# Altium PCB Motor-28.PcbDoc
Units mm, origin at the board's own origin, x right, y up, seen from the top; angles counter-clockwise.
Board outline 28 x 28 mm, 2 copper layers (Top Layer, Bottom Layer); 33 components, 20 nets, 185 pads, 45 vias.
Unrouted connection lines stored in the file: 17.
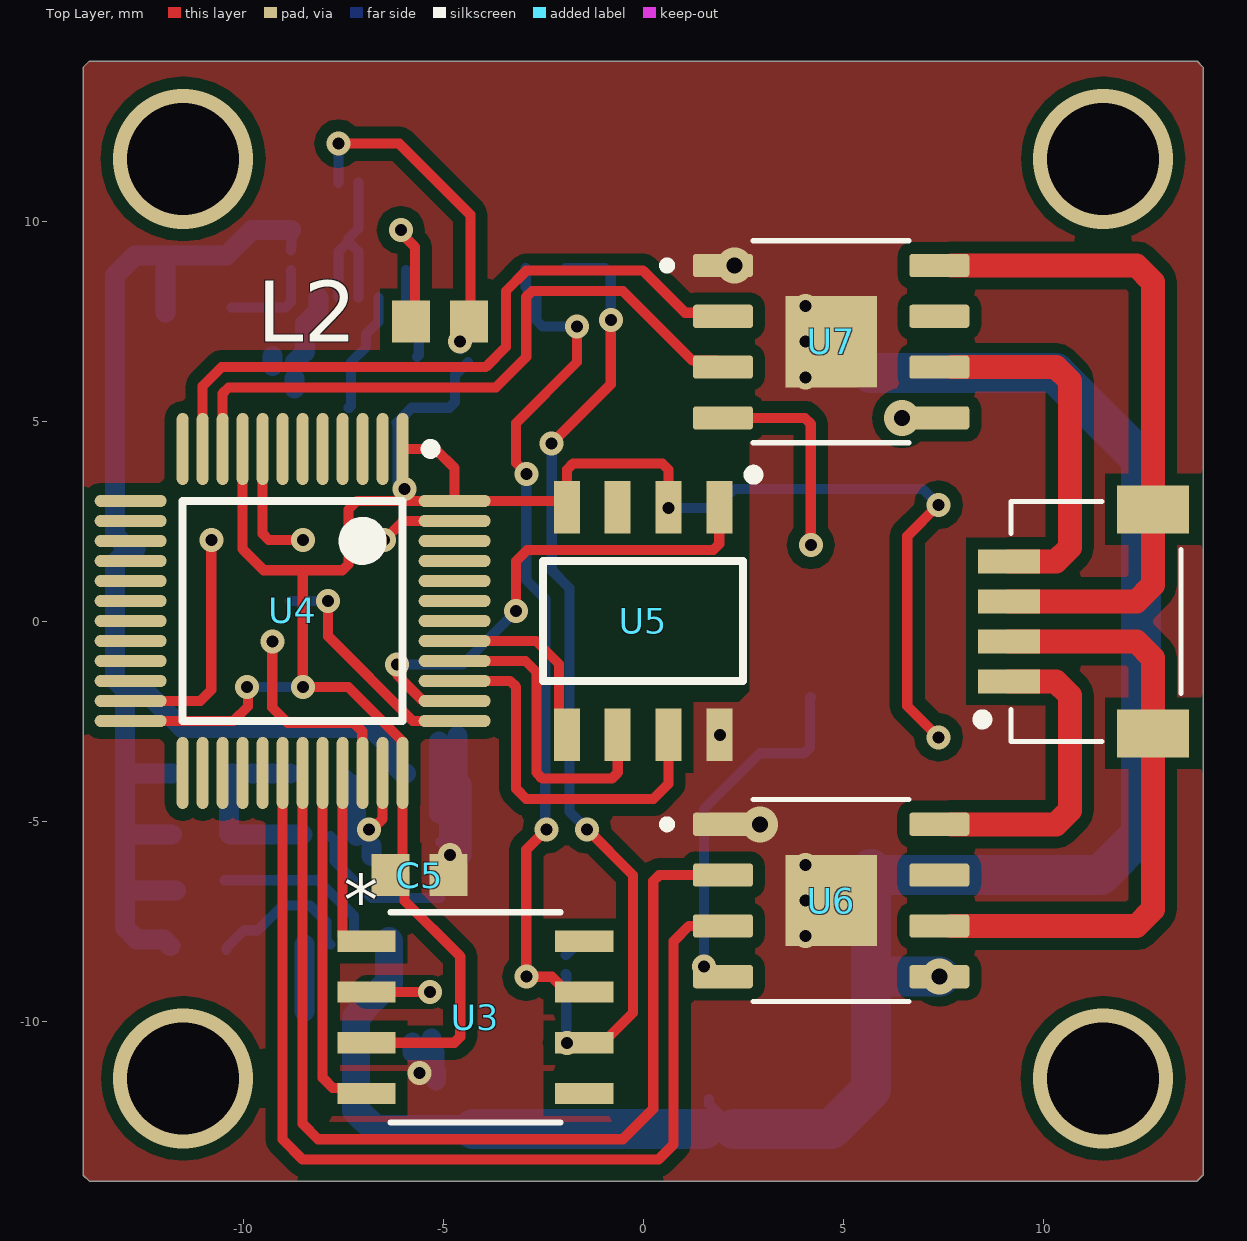
[diagram p0: Top Layer view]
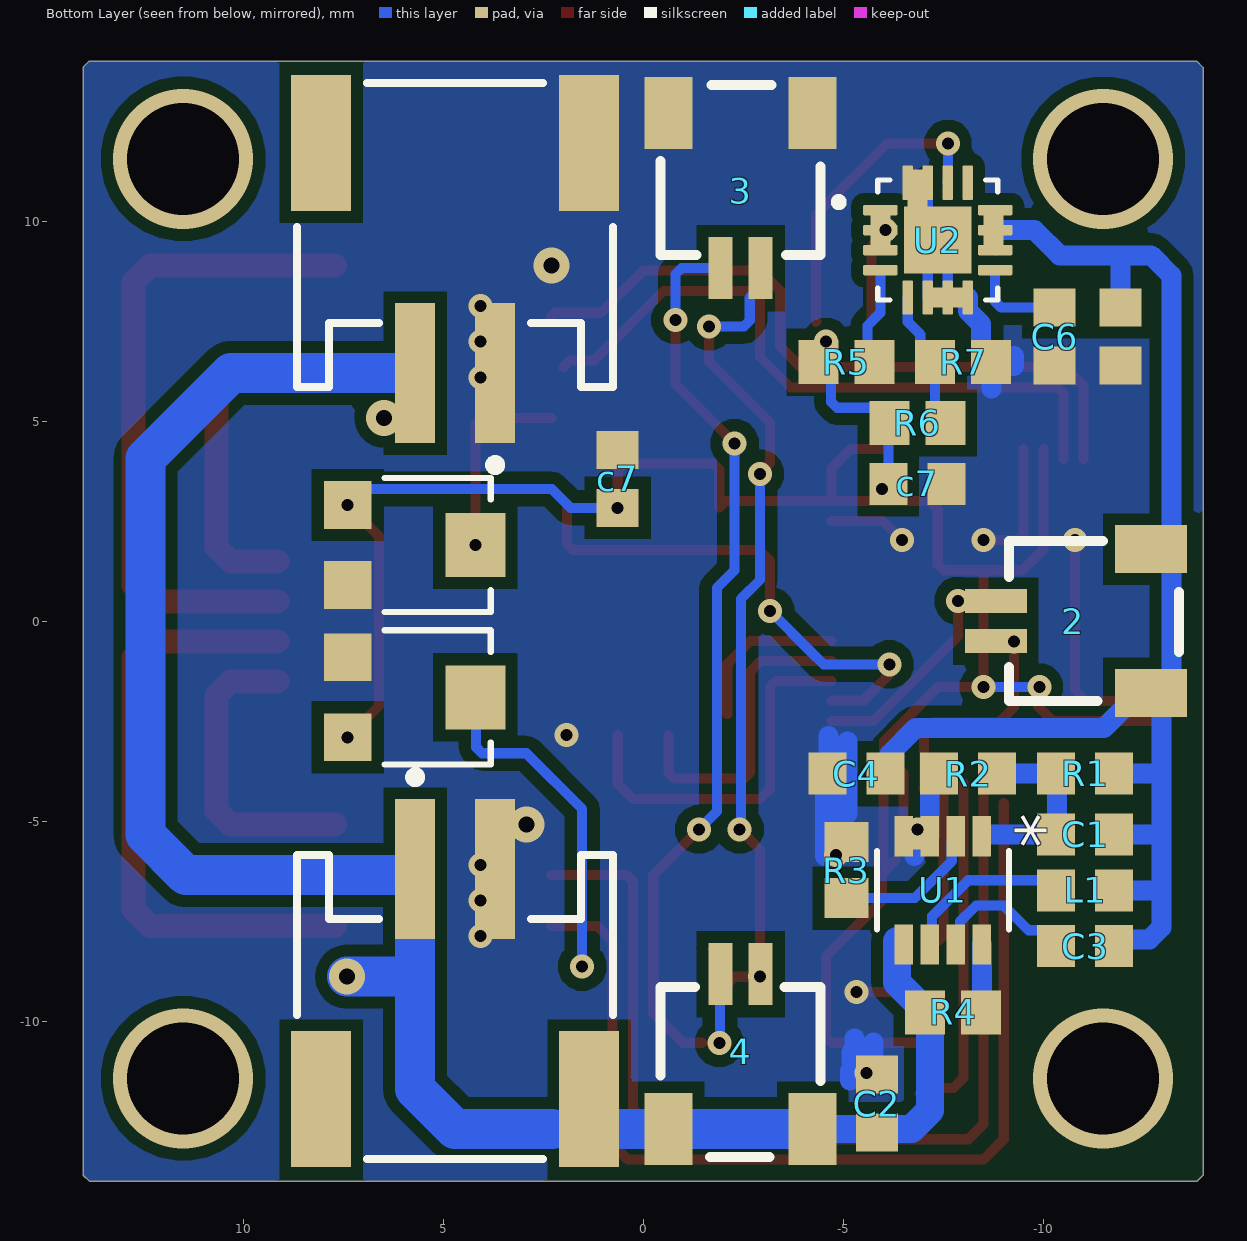
[diagram p1: Bottom Layer view, seen from below]
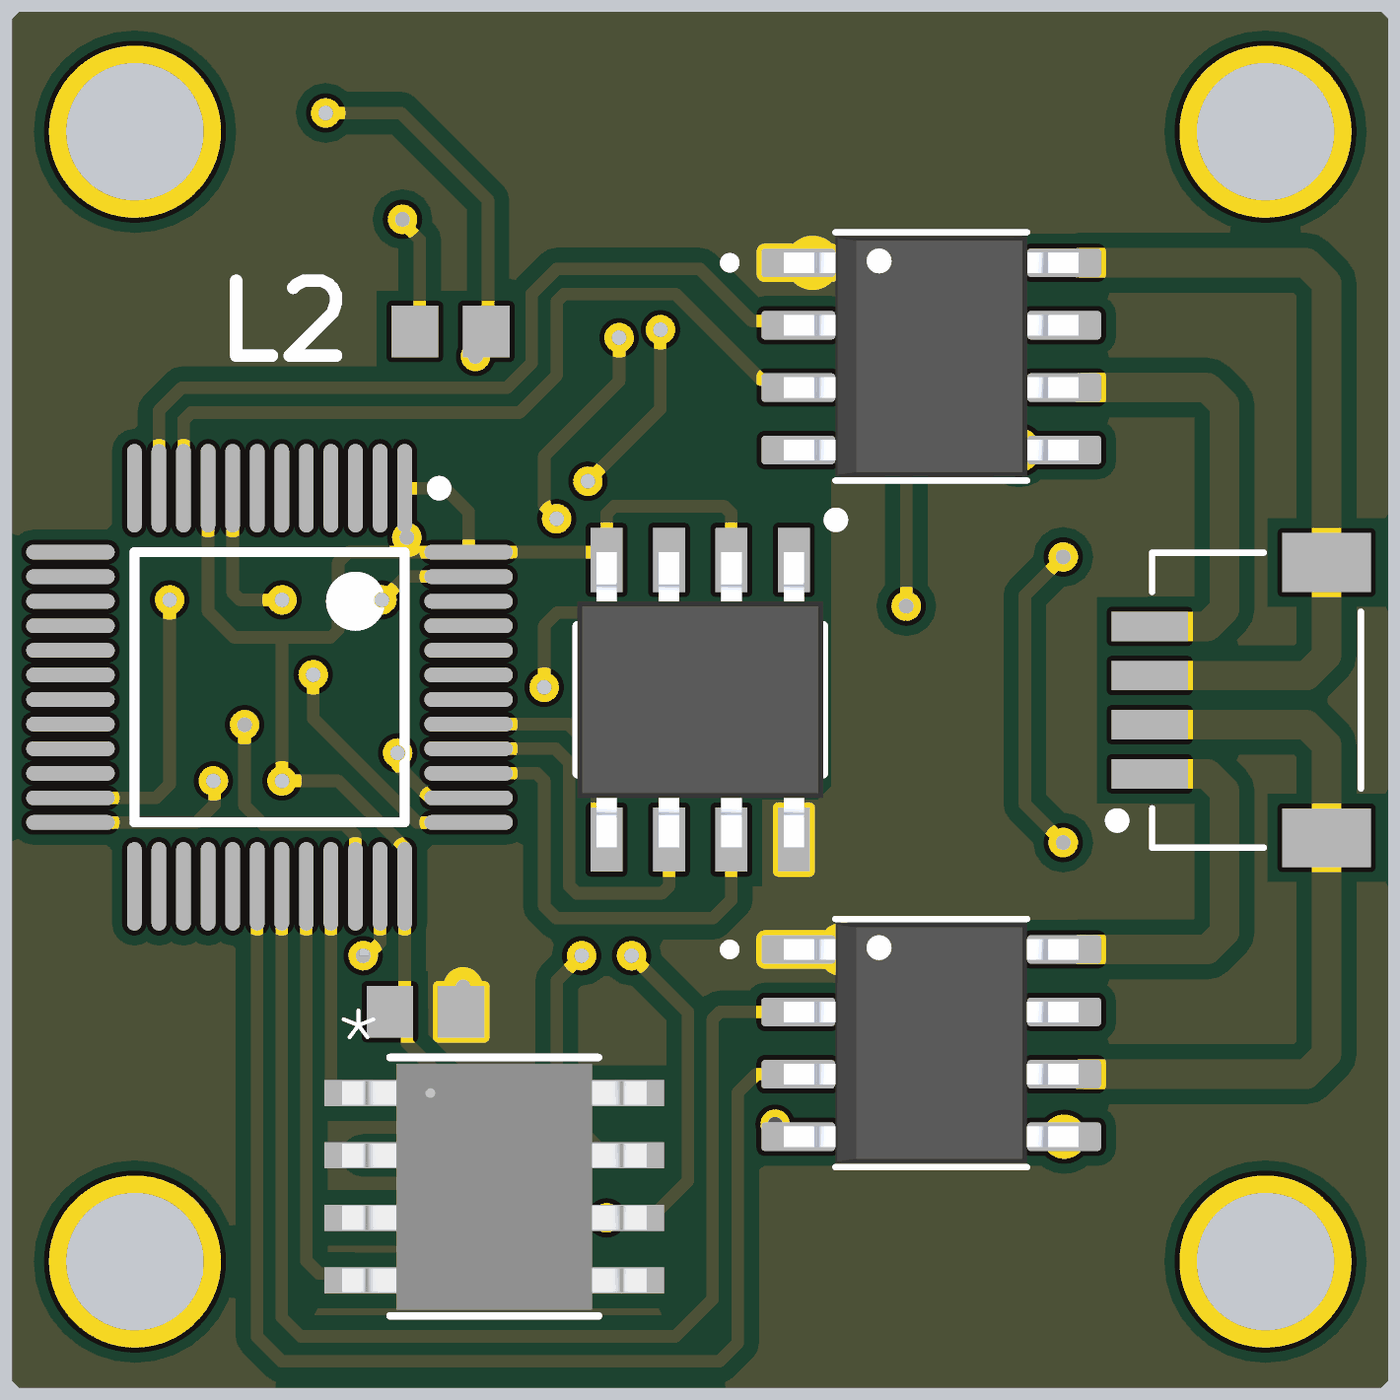
[diagram p2: 3D render of the assembled board from above, using the file's embedded part models]

## Layer stack, top to bottom
Top Solder: solder mask 0.0102, Solder Resist, Dk 3.5
Top Layer: signal copper 0.0356
Dielectric 1: dielectric 0.32, FR-4, Dk 4.8
Bottom Layer: signal copper 0.0356
Bottom Solder: solder mask 0.0102, Solder Resist, Dk 3.5

## Board outline
-13.851,-14 -14,-13.851 -14,13.843 -13.843,14 13.851,14 14,13.851 14,-13.851 13.851,-14

## Design rules (kind name [scope] priority, off if disabled: settings)
Clearance [All] p1: gap=0.1 ignorepadtopadclearanceinfootprint=TRUE
PolygonConnect [All] p1: connectstyle=Direct reliefconductorwidth=0.254 reliefentries=4 polygonreliefangle="90 Angle" airgapwidth=0.254
RoutingVias [All] p1: holewidth=0.711 width=1.27 viastyle="Through Hole" minholewidth=0 minwidth=0 maxholewidth=5 maxwidth=5
SolderMaskExpansion [All] p1: expansion=0.102 istentingtop=FALSE
Width [All] p1: maxlimit=3 minlimit=0.254 preferedwidth=0.254
30 further rules are at their usual default settings.

## Classes and differential pairs
component class Motor-28: C1 C2 C3 C4 C6 c7 R1 R2 R3 R4 R5 R6 R7 U1 U2 U3 U4 U5 U6 U7

## Components (designator, comment, footprint, x,y, rotation, side; value= is the part's Value field where it differs from the comment)
2 "Comment" SM02B-SRSS-TB(LF)(SN) -10.795,0 r90 bottom
3 "Comment" SM02B-SRSS-TB(LF)(SN) -2.435,10.8 r0 bottom
4 "Comment" SM02B-SRSS-TB(LF)(SN) -2.435,-10.8 r180 bottom
C1 "12pF" CAPC1608X90X35ML10T15 -11.049,-5.334 r180 bottom
C2 "100uF" CAPC1608X90X35ML10T15 -5.842,-12.065 r270 bottom
C3 "10nF" CAPC1608X90X35ML10T15 -11.049,-8.128 r180 bottom
C4 "100uF" CAPC1608X90X35ML10T15 -5.334,-3.81 r180 bottom
C5 "100uF" CAPC1608X90X35ML10T15 -5.588,-6.35 r180 top (schematic designator C4)
C5 "10uF" CAPC1608X90X35ML10T15 -11.938,7.112 r90 bottom
C6 "3.3nF" CAPC1608X90X35ML10T15 -10.287,7.112 r90 bottom
c7 "22uF" CAPC1608X90X35ML10T15 0.635,3.556 r90 bottom
c7 "22uF" CAPC1608X90X35ML10T15 -6.858,3.429 r0 bottom
L1 "10nF" CAPC1608X90X35ML10T15 -11.049,-6.731 r180 bottom (schematic designator C3)
L2 "10nF" CAPC1608X90X35ML10T15 -5.08,7.493 r0 top (schematic designator C3)
R1 "110K" RESC1608X55X30ML20T20#1 -11.049,-3.81 r180 bottom
R2 "15K" RESC1608X55X30ML20T20#1 -8.128,-3.81 r180 bottom
R3 "47K" RESC1608X55X30ML20T20#2 -5.08,-6.223 r270 bottom
R4 "47K" RESC1608X55X30ML20T20#2 -7.747,-9.779 r0 bottom
R5 "100K" RESC1608X55X30ML20T20#2 -5.08,6.477 r180 bottom
R6 "750K" RESC1608X55X30ML20T20#2 -6.858,4.953 r180 bottom
R7 "240K" RESC1608X55X30ML20T20#2 -8.001,6.477 r0 bottom
U1 "SY8303AIC" TSOT_303AIC_SGY -7.493,-6.731 r270 bottom
U2 "TLV62130RGTR" QFN50P300X300X100-17N -7.366,9.525 r180 bottom
U3 "TJA1051T31J" SO8_SOT96-1_NXP -4.191,-9.906 r0 top
U4 "STM32F101CBT6" LQFP48_N -8.763,0.254 r270 top
U5 "MT6816" SOIC127P600X175-8N-8-V 0,0 r270 top
U6 "TB67H450FNG,EL" SOIC127P599X175-9N 4.699,-6.985 r0 top
U7 "TB67H450FNG,EL" SOIC127P599X175-9N 4.7,6.985 r0 top
? "Comment" EVM-3ESX50B14_PAN 5.842,-1.905 r270 bottom
? "Comment" EVM-3ESX50B14_PAN 5.842,1.905 r270 bottom
? "Comment" JST_SM04B-SRSS-TB(LF)(SN) 8.867,-0.008 r90 top
? "Comment" "JST- S2B-PH-SM4-TB(LF)(SN)-2_V" 4.7,9.652 r0 bottom
? "Comment" "JST- S2B-PH-SM4-TB(LF)(SN)-2_V" 4.699,-9.652 r180 bottom

## Footprints (in the part's own frame and the unit in brackets; to place one, negate y for a bottom-side part, rotate by r counter-clockwise, add the part's x,y. Pads: shape width x height; smd on the part's side, far side on the other; paste and mask are expansions set on the pad)
CAPC1608X90X35ML10T15 [mm] "Chip Capacitor, 2-Leads, Body 1.60x0.80mm, IPC Low Density"
  rect 0.95x1.05 smd: 1(-0.725,0) 2(0.725,0)
  body extent -0.85,-0.45 0.85,0.45, height 0.9
EVM-3ESX50B14_PAN [mil]
  rect 47x47 smd paste+0 mask+0: 1(-39.38,-60.75) 3(39.37,-60.75)
  rect 62.99x59.06 smd paste+0 mask+0: 2(0,65)
  silkscreen extent -66,-25 66,80
"JST- S2B-PH-SM4-TB(LF)(SN)-2_V" [mm] "SMD, 2-Leads, Body 7.9x7.6mm, Pitch 2mm"
  rect 1x3.5 smd: 1(-1,3.45) 2(1,3.45)
  rect 1.5x3.4 smd: MP1(-3.35,-2.3) MP2(3.35,-2.3)
  silkscreen extent -3.95,-3.8 3.95,5.87, body extent -3.95,-3.8 3.95,4.8, height 5.6
JST_SM04B-SRSS-TB(LF)(SN) [mm]
  rect 0.6x1.55 smd: 1(-1.5,-0.277) 2(-0.5,-0.277) 3(0.5,-0.277) 4(1.5,-0.277)
  rect 1.2x1.8 smd: S1(-2.8,-3.875) S2(2.8,-3.875)
  silkscreen extent -3,-4.57 3,0.48
LQFP48_N [mm] "Thin QFP, 48-Leads, Body 7x7mm, Pitch 0.5mm, IPC Medium Density"
  oval 1.8x0.3 smd: 1(-4.05,2.75) 2(-4.05,2.25) 3(-4.05,1.75) 4(-4.05,1.25) 5(-4.05,0.75) 6(-4.05,0.25) 7(-4.05,-0.25) 8(-4.05,-0.75) 9(-4.05,-1.25) 10(-4.05,-1.75) 11(-4.05,-2.25) 12(-4.05,-2.75) 25(4.05,-2.75) 26(4.05,-2.25) 27(4.05,-1.75) 28(4.05,-1.25) 29(4.05,-0.75) 30(4.05,-0.25) 31(4.05,0.25) 32(4.05,0.75) 33(4.05,1.25) 34(4.05,1.75) 35(4.05,2.25) 36(4.05,2.75)
  oval 0.3x1.8 smd: 13(-2.75,-4.05) 14(-2.25,-4.05) 15(-1.75,-4.05) 16(-1.25,-4.05) 17(-0.75,-4.05) 18(-0.25,-4.05) 19(0.25,-4.05) 20(0.75,-4.05) 21(1.25,-4.05) 22(1.75,-4.05) 23(2.25,-4.05) 24(2.75,-4.05) 37(2.75,4.05) 38(2.25,4.05) 39(1.75,4.05) 40(1.25,4.05) 41(0.75,4.05) 42(0.25,4.05) 43(-0.25,4.05) 44(-0.75,4.05) 45(-1.25,4.05) 46(-1.75,4.05) 47(-2.25,4.05) 48(-2.75,4.05)
  silkscreen extent -4.17,-2.75 2.75,3.58, body extent -3.5,-3.5 3.5,3.5, height 1.6
QFN50P300X300X100-17N [mm]
  rrect25% 0.86x0.26 smd: 1(-1.435,0.75) 2(-1.435,0.25) 3(-1.435,-0.25) 4(-1.435,-0.75) 9(1.435,-0.75) 10(1.435,-0.25) 11(1.435,0.25) 12(1.435,0.75)
  rrect25% 0.26x0.86 smd: 5(-0.75,-1.435) 6(-0.25,-1.435) 7(0.25,-1.435) 8(0.75,-1.435) 13(0.75,1.435) 14(0.25,1.435) 15(-0.25,1.435) 16(-0.75,1.435)
  rect 1.68x1.68 smd paste-2: 17(0,0)
  round 0.4 smd mask+0: 18(0,0) 19(-0.58,0.58) 20(0.58,0.58) 21(-0.58,-0.58) 22(0.58,-0.58)
  silkscreen extent -2.57,-1.5 1.5,1.5
RESC1608X55X30ML20T20#1 [mm] "Chip Resistor, 2-Leads, Body 1.60x0.80mm, IPC Low Density"
  rect 0.95x1.05 smd: 1(-0.725,0) 2(0.725,0)
  body extent -0.9,-0.5 0.9,0.5, height 0.55
RESC1608X55X30ML20T20#2 [mm] "Chip Resistor, 2-Leads, Body 1.60x0.80mm, IPC Low Density"
  rect 1x1.1 smd: 1(-0.7,0) 2(0.7,0)
  body extent -0.9,-0.5 0.9,0.5, height 0.55
SM02B-SRSS-TB(LF)(SN) [mm]
  rect 0.6x1.55 smd: 1(-0.5,1.975) 2(0.5,1.975)
  rect 1.2x1.8 smd: 3(-1.8,-1.9) 4(1.8,-1.9)
  silkscreen extent -2,-2.6 2,1.65
SO8_SOT96-1_NXP [mil]
  rect 57.5x21 smd paste+0 mask+0: 1(-107.25,75) 2(-107.25,25) 3(-107.25,-25) 4(-107.25,-75) 5(107.25,-75) 6(107.25,-25) 7(107.25,25) 8(107.25,75)
  silkscreen extent -84,-104 84,104, body extent -122,-99 122,99, height 69
SOIC127P599X175-9N [mm]
  rrect25% 1.5x0.58 smd: 1(-2.705,1.905) 2(-2.705,0.635) 3(-2.705,-0.635) 4(-2.705,-1.905) 5(2.705,-1.905) 6(2.705,-0.635) 7(2.705,0.635) 8(2.705,1.905)
  rect 2.285x2.285 smd paste-2: 9(0,0)
  silkscreen extent -4.2,-2.52 1.95,2.52, body extent -3,-2.45 3,2.45, height 1.75
SOIC127P600X175-8N-8-V [mm]
  rect 1.31x0.65 smd: 1(-2.845,1.905) 2(-2.845,0.635) 3(-2.845,-0.635) 4(-2.845,-1.905) 5(2.845,-1.905) 6(2.845,-0.635) 7(2.845,0.635) 8(2.845,1.905)
  silkscreen extent -3.78,-2.5 1.5,2.89, body extent -3,-2.5 3,2.5, height 1.75
TSOT_303AIC_SGY [mil]
  rect 39.5x18 smd paste+0 mask+0: 1(-53.25,38.38) 2(-53.25,12.79) 3(-53.25,-12.79) 4(-53.25,-38.38) 5(53.25,-38.38) 6(53.25,-12.79) 7(53.25,12.79) 8(53.25,38.38)
  silkscreen extent -39,-65 39,65, body extent -59,-60 59,60, height 43

## Part data
C1 C2 C3 C4 C5 C5 C6 c7 c7 L1 L2: library part CMP-2006-02924-1, Manufacturer=Murata, PART NUMBER=GRM188R71H472KA01D
R1 R2 R3 R4 R5 R6 R7: library part CMP-2000-00054-1, Manufacturer=Panasonic, PART NUMBER=ERA3AEB392V
U1: "No Description Available", Mfr_Name=Silergy, RefDes=RefDes, Type=Type
U2: "3-17V 3A Step-Down Converter in 3x3 QFN Package 16-VQFN -40 to 85", Package="VQFN-16 Texas Instruments", Availability=Unavailable, DigiKey-Purchase-URL=https://snapeda.com/shop?store=DigiKey&id=423292, MF="Texas Instruments", Mouser-Purchase-URL=https://snapeda.com/shop?store=Mouser&id=423292, MP=TLV62130RGTR, Price=None, SnapEDA_Link=https://www.snapeda.com/parts/TLV62130RGTR/Texas%20Instruments/view-part/423292/?ref=snap, Texas_Instruments-Purchase-URL=https://snapeda.com/shop?store=Texas+Instruments&id=423292
U3: "No Description Available", Mfr_Name=NXP, RefDes=RefDes, Type=Type
U4: "STM32 ARM-based 32-bit MCU with 128 Kbytes Flash, 48-pin LQFP, Industrial Temperature", ComponentLink1Description="Manufacturer Link", ComponentLink1URL=www.st.com/stm32, ComponentLink2Description=Datasheet, ComponentLink2URL=http://www.st.com/stonline/products/literature/ds/13586.pdf, DatasheetVersion="rev6, Mar-2008", PackageDescription="48-Pin Low-Profile Quad Flat Pack, 7 x 7 mm Body, 0.5 mm Pitch (LQFP48)", PackageReference=LQFP48, PackageVersion=Mar-2008, Published=30-May-2008, Publisher="Altium Limited"
U5: library part TLE5012B_E1000, "TLE5012B/TLI5012B Angular and Linear Position Sensor Evaluation Board Automotive", Package="SOIC-8 Infineon Technologies", Availability="In Stock", Check_prices=https://www.snapeda.com/parts/TLE5012B%20E1000/Infineon+Technologies/view-part/?ref=eda, MF="Infineon Technologies", MP="TLE5012B E1000", Price=None, SnapEDA_Link=https://www.snapeda.com/parts/TLE5012B%20E1000/Infineon+Technologies/view-part/?ref=snap
U6 U7: "- Motor Driver - - 8-HSOP", Package="SOIC-8 Toshiba Semiconductor and Storage", Availability="In Stock", Check_prices=https://www.snapeda.com/parts/TB67H450FNG,EL/Toshiba+Semiconductor+and+Storage/view-part/?ref=eda, MF="Toshiba Semiconductor and Storage", MP=TB67H450FNG,EL, Price=None, Purchase-URL=https://pricing.snapeda.com/search?q=TB67H450FNG,EL&ref=eda, SnapEDA_Link=https://www.snapeda.com/parts/TB67H450FNG,EL/Toshiba+Semiconductor+and+Storage/view-part/?ref=snap

## Free pads (board coordinates)
  rect 0.5x1 smd far side: 2(-8.763,9.779) 2(-6.858,10.795) 2(-5.931,9.775)
  rect 1x0.5 smd far side: 2(-7.616,8.09)
  rect 0.5x0.5 smd far side: 2(-6.858,-5.461)

## Via types
v1: diameter 0.6, hole 0.3, Top Layer to Bottom Layer, 37 vias
v2: diameter 0.9, hole 0.4, Top Layer to Bottom Layer, 4 vias
v3: diameter 3.5, hole 2.8, Top Layer to Bottom Layer, 4 vias

## Nets (pads, with @x,y where several pads share a name; then routed paths per layer and width w, separated by ;. In a path a pad name is that pad's centre, name@x,y a point inside that pad or via, vN(x,y) a via of type N, cw(c..) or ccw(c..) an arc to the next point about the centre after c; other vN are vias at no path point)
CANH: 3.1 4.2 U3.7 | length 21.1
  Top Layer w0.254: v1(-2.921,3.683) -2.921,3.701 -3.175,3.955 -3.175,4.953 -1.651,6.477 v1(-1.651,7.366) ; v1(-2.413,-5.207) -2.921,-5.715 v1(-2.921,-8.89) -2.286,-8.89 U3.7@-1.905,-9.271
  Bottom Layer w0.254: 3.1 -2.935,8.35 -2.667,8.082 -2.667,7.515 -2.518,7.366 v1(-1.651,7.366) ; v1(-2.921,3.683) -2.921,1.028 -2.448,0.555 -2.448,-5.172 v1(-2.413,-5.207)
CANL: 3.2 4.1 U3.6 | length 24.6
  Top Layer w0.254: v1(-2.286,4.445) -0.809,5.922 v1(-0.809,7.528) ; U3.6 -1.003,-10.541 -0.254,-9.792 -0.254,-6.35 v1(-1.397,-5.207)
  Bottom Layer w0.254: v1(-2.286,4.445) -2.286,1.27 -1.844,0.828 -1.844,-4.76 v1(-1.397,-5.207) ; 4.1 -1.92,-8.84 -1.92,-10.526 v1(-1.905,-10.541) ; 4.1@-1.935,-8.35 4.1@-1.762,-8.177 ; 3.2 -0.958,8.825 -0.809,8.676 v1(-0.809,7.528)
GND: 3.3 3.4 ?.1@3.7,6.202 ?.1@7.385,-0.905 ?.2@3.699,-6.202 ?.3@7.385,0.905 ?.MP1@1.35,11.952 C2.1 C4.1 C5.1 C6.1 c7.1@-7.583,3.429 c7.2@0.635,4.281 pad.2@-6.858,10.795 pad.2@-6.858,-5.461 pad.2@-7.616,8.09 R2.1 R3.1 R7.1 U1.3 U1.4 U2.6 U2.7 U2.8 U2.15 U2.16 U2.17 U2.18 U2.19 U2.20 U2.21 U2.22 U3.2 U4.8 U4.23 U4.35 U4.47 U5.8 U6.1 U6.9 U7.1 U7.9 | length 32.9
  Top Layer w0.254: U4.23 -11.071,-1.996 -10.795,-1.72 v1(-10.795,2.032) ; U4.8 -9.513,2.181 -9.364,2.032 v1(-8.509,2.032) ; U3.2@-6.866,-9.271 v1(-5.334,-9.271) ; v1(-6.858,-5.207) -6.811,-5.16 -6.728,-5.16 -6.513,-4.945 U4.35 ; v1(-6.477,2.032) -6.466,2.032 -5.994,2.504 U4.47
  Bottom Layer w0.254: U2.7 -7.616,9.235 U2.17@-7.366,9.485 ; R2.1@-7.428,-3.81 R2.1@-7.168,-4.07 ; U2.6 -7.116,9.235 U2.17@-7.366,9.485 ; U2.15 -7.116,9.815 -7.366,9.565 U2.17 U2.17@-7.366,9.485 ; v1(-5.588,-11.303) -5.588,-11.136 C2.1@-5.444,-10.992 ; R3.1 -5.03,-5.523 R3.1@-4.826,-5.319 ; C4.1@-4.953,-4.154 C4.1
  Bottom Layer w0.455: C4.1@-4.792,-3.81 C4.1@-4.792,-3.627
  Bottom Layer w0.48: U1.3 R2.1@-7.168,-4.07
  Bottom Layer w0.5: -9.27,6.374 -9.27,6.628 ; -8.71,5.813 R7.1@-8.71,6.067 ; R7.1 -8.451,6.727 -8.451,7.424 -8.116,7.759 U2.8 ; -6.787,-5.871 pad.2@-6.787,-5.617 ; -5.761,-10.787 -5.761,-10.533 ; C2.1@-5.453,-11.095 -5.453,-10.841 ; -5.286,-10.693 -5.286,-10.439 ; -5.216,-11.025 -5.216,-10.771 ; -5.178,-11.49 -5.178,-11.236 ; -5.107,-4.804 -5.107,-3.004 ; R3.1@-4.853,-5.751 C4.1@-4.853,-3.951 ; -4.636,-4.677 -4.636,-2.877 ; R3.1@-4.546,-5.878 C4.1@-4.546,-4.078
  other v1: 4.064,-7.874 4.064,-6.985 4.064,-6.096 -4.826,-5.842 1.916,-2.85 4.064,6.096 4.064,6.985 4.064,7.874
  other v2: 2.921,-5.08 2.286,8.89
NetC1_1: C1.1 R1.1 R2.2 U1.1 | length 4.9
  Bottom Layer w0.254: C1.1@-10.349,-5.309 C1.1 ; U1.1@-8.512,-5.334 U1.1
  Bottom Layer w0.5: C1.1@-10.349,-5.309 -10.349,-3.81 R2.2@-8.828,-3.81 ; C1.1 U1.1@-8.512,-5.334
NetC3_1: C3.1 U1.7 | length 3.8
  Bottom Layer w0.254: C3.1@-10.415,-8.219 -10.415,-8.169 -9.976,-7.73 -9.635,-7.73 -9.017,-7.112 -8.322,-7.112 -7.92,-7.515 -7.92,-7.982 U1.7
NetC6_2: C6.2 U2.9 | length 2.3
  Bottom Layer w0.254: C6.2 -8.95,7.837 -8.801,7.986 U2.9
NetL1_1: L1.1 U1.6 | length 4.3
  Bottom Layer w0.254: L1.1@-10.459,-6.477 -8.128,-6.477 -7.225,-7.38 -7.225,-8.026 U1.6
NetL2_1: L2.1 pad.2@-5.931,9.775 U2.1 U2.2 U2.3 | length 2.4
  Top Layer w0.254: v1(-6.058,9.775) -6.058,9.708 -5.706,9.357 L2.1@-5.706,7.493
NetP1_2: 
NetP1_3: 
NetR3_2: R3.2 U1.2 | length 3.7
  Bottom Layer w0.254: U1.2 -7.716,-5.48 -7.716,-6 -6.793,-6.923 R3.2
NetR4_1: R4.1 U1.8 | length 1.7
  Bottom Layer w0.5: R4.1@-8.468,-9.758 U1.8
NetR5_2: R5.2 U2.4 | length 2.3
  Bottom Layer w0.254: U2.4 -5.931,7.709 -5.608,7.386 -5.608,6.649 R5.2@-5.653,6.604
NetR6_2: R6.2 R7.2 U2.5 | length 3.1
  Bottom Layer w0.254: R6.2@-7.366,5.334 -7.343,5.334 -7.301,5.376 R7.2 -6.928,6.85 -6.928,7.169 -6.616,7.481 U2.5
NetU3_1: U3.1 U4.33 | length 4.3
  Top Layer w0.254: U4.33@-7.513,-4.05 -7.513,-7.861 -7.373,-8.001 U3.1@-7.124,-8.001
NetU3_4: U3.4 U4.32 | length 8.6
  Top Layer w0.254: U4.32@-8.013,-4.05 -8.013,-11.418 -7.76,-11.671 -7.055,-11.671 U3.4
NetU3_8: U3.8
VCC_3V3: ?.1@7.385,2.905 ?.3@7.385,-2.905 C5.2@-6.313,-6.35 c7.1@0.635,2.831 c7.2@-6.133,3.429 L2.2 R5.1 R6.1 U2.14 U3.3 U4.1 U4.9 U4.24 U4.36 U4.48 U5.2 U5.4 | length 66.7
  Top Layer w0.254: U4.24 -10.243,-2.496 -9.88,-2.133 -9.88,-1.677 v1(-9.906,-1.651) ; U4.9 -10.013,1.8 -9.483,1.27 -8.509,1.27 ; v1(-7.62,11.938) -6.096,11.938 -4.318,10.16 -4.318,7.502 -4.327,7.493 L2.2@-4.318,7.484 ; U3.3@-6.985,-10.541 U3.3 -4.721,-10.541 -4.572,-10.392 -4.572,-8.382 -5.965,-6.989 -5.965,-6.317 C5.2@-6.139,-6.143 ; C5.2@-6.313,-5.969 C5.2@-6.139,-6.143 ; U4.36@-6.013,-4.05 -6.013,-6.017 C5.2@-6.139,-6.143 ; U4.36 -6.022,-3.787 -6.022,-2.995 -7.366,-1.651 v1(-8.509,-1.651) -8.509,1.27 ; U4.1 -5.193,4.304 -4.713,3.824 U4.48 ; v1(0.635,2.831) 0.635,3.788 0.486,3.937 -1.756,3.937 -1.905,3.788 U5.4 -2.064,3.004 U4.48 ; v1(7.385,-2.905) 6.604,-2.124 6.604,2.124 v1(7.385,2.905) ; -8.509,1.27 -7.515,1.27 -7.366,1.419 -7.366,2.794 -7.156,3.004 U4.48
  Bottom Layer w0.254: v1(-9.906,-1.651) v1(-8.509,-1.651) ; v1(-7.62,11.938) -7.618,11.936 -7.618,10.962 U2.14 ; R6.1 -6.158,4.961 -5.785,5.334 -4.848,5.334 -4.699,5.483 -4.699,6.158 R5.1 ; R6.1@-6.133,4.851 -6.133,3.429 -6.096,3.429 v1(-5.969,3.302) ; v1(-4.572,6.985) -4.572,6.819 R5.1@-4.549,6.796 ; v1(0.635,2.831) 1.815,2.831 2.286,3.302 6.988,3.302 v1(7.385,2.905)
VCC_5V: 2.3 2.4 C1.2 C3.2 C4.2 C5.2@-11.938,7.837 L1.2 pad.2@-8.763,9.779 R1.2 U2.10 U2.11 U2.12 U2.13 | length 36.6
  Bottom Layer w0.254: U2.10@-8.804,9.27 -8.804,9.275 -8.772,9.773 -8.771,9.775 U2.11@-8.763,9.779
  Bottom Layer w0.5: -12.805,-3.81 R1.2@-11.756,-3.81 ; 2.4 2.4@-12.858,1.8 ; C5.2@-11.938,7.71 -11.938,9.144 ; C3.2@-11.819,-8.128 -11.992,-7.954 -12.661,-7.954 -12.954,-7.662 -12.954,-6.731 ; C1.2 -12.954,-5.334 ; L1.2@-11.683,-6.731 -12.954,-6.731 ; U2.11 -9.783,9.775 -10.414,9.144 -11.938,9.144 ; C4.2@-5.932,-3.81 -6.009,-3.81 -6.157,-3.662 -6.157,-3.326 -6.816,-2.667 -11.528,-2.667 -12.395,-1.8 2.3 2.3@-12.858,-1.8 ; -12.954,-6.731 -12.954,-5.334 ; -12.954,-5.334 -12.954,-3.81 -12.954,-1.8 2.3@-12.858,-1.8 ; 2.3@-12.858,-1.8 -13.208,-1.45 -13.208,1.45 2.4@-12.858,1.8 ; 2.4@-12.858,1.8 -13.208,2.15 -13.208,8.636 -12.7,9.144 -11.938,9.144
VCC_24V: 4.3 4.4 ?.1@5.699,-6.202 ?.2@5.7,6.202 ?.MP2@1.349,-11.952 C2.2 R4.2 U1.5 U6.5 U7.5 | length 49.4
  Bottom Layer w0.254: ?.MP2@1.65,-11.952 1.65,-12.077 2.273,-12.7 ; 6,-8.8 6.09,-8.89
  Bottom Layer w0.7: R4.2@-7.174,-9.906 -7.174,-12.231 -6.705,-12.7 -5.842,-12.7 4.4 ; R4.2 -7.047,-9.729 -6.35,-9.032 U1.5@-6.35,-8.001
  Bottom Layer w1: 4.4 4.3 ?.MP2@1.524,-12.7 ; 2.273,-12.7 4.699,-12.7 5.699,-11.7 5.699,-8.8 5.699,-6.202 5.699,-6.35 11.43,-6.35 12.446,-5.334 12.446,4.064 10.308,6.202 ?.2@5.7,6.202 ; 6.09,-8.89 v2(7.404,-8.89)
  other v2: 6.477,5.08
pads on no net: 2.1 2.2 ?.1@9.144,-1.508 ?.2@4.191,1.905 ?.2@4.191,-1.905 ?.2@9.144,-0.508 ?.3@9.144,0.492 ?.4 ?.MP1@8.049,-11.952 ?.MP2@8.05,11.952 ?.S1 ?.S2 U3.5 U4.2 U4.3 U4.4 U4.5 U4.6 U4.7 U4.10 U4.11 U4.12 U4.13 U4.14 U4.15 U4.16 U4.17 U4.18 U4.19 U4.20 U4.21 U4.22 U4.25 U4.26 U4.27 U4.28 U4.29 U4.30 U4.31 U4.34 U4.37 U4.38 U4.39 U4.40 U4.41 U4.42 U4.43 U4.44 U4.45 U4.46 U5.1 U5.3 U5.5 U5.6 U5.7 U6.2 U6.3 U6.4 U6.6 U6.7 U6.8 U7.2 U7.3 U7.4 U7.6 U7.7 U7.8
copper on no net: | length 193
  Top Layer w0.254: -11.013,4.05 -11.013,5.878 -10.541,6.35 -3.937,6.35 -3.429,6.858 -3.429,8.255 -2.921,8.763 0,8.763 1.055,7.708 2.207,7.708 2.295,7.62 ; -10.513,4.05 -10.513,5.693 -10.364,5.842 -3.683,5.842 -2.921,6.604 -2.921,8.106 -2.772,8.255 -0.508,8.255 1.234,6.513 1.832,6.513 1.995,6.35 ; v1(-9.271,-0.508) -9.271,-2.159 -8.89,-2.54 -7.239,-2.54 -7.022,-2.757 -7.022,-4.168 -7.013,-4.177 ; -9.017,-4.555 -9.017,-12.954 -8.509,-13.462 0.381,-13.462 0.762,-13.081 0.762,-8.001 1.143,-7.62 2.295,-7.62 ; -8.513,-4.05 -8.513,-12.569 -8.128,-12.954 -0.508,-12.954 0.254,-12.192 0.254,-6.499 0.403,-6.35 2.295,-6.35 ; v1(-7.874,0.508) -7.874,-0.381 -5.759,-2.496 -4.713,-2.496 ; v1(-6.157,-1.082) -6.157,-1.336 -5.506,-1.987 -4.722,-1.987 -4.713,-1.996 ; -4.713,-1.496 -3.324,-1.496 -3.175,-1.645 -3.175,-2.399 -3.175,-4.191 -2.921,-4.445 0.254,-4.445 0.508,-4.191 0.635,-4.064 0.635,-2.845 ; -4.713,-0.996 -2.941,-0.996 -2.667,-1.27 -2.667,-3.788 -2.518,-3.937 -0.784,-3.937 -0.635,-3.788 -0.635,-2.845 ; -4.713,-0.496 -2.679,-0.496 -2.103,-1.072 -2.103,-2.317 ; v1(-3.175,0.254) -3.175,1.502 -2.899,1.778 1.756,1.778 1.905,1.927 1.905,2.845 ; 2.295,5.08 4.042,5.08 4.191,4.931 v1@4.191,1.792
  Top Layer w0.6: 7.705,-7.62 12.332,-7.62 12.742,-7.21 12.742,-2.808 12.742,-0.918 12.332,-0.508 9.144,-0.508 ; 7.705,-5.08 10.317,-5.08 10.668,-4.729 10.668,-1.859 10.317,-1.508 9.144,-1.508 ; 7.705,6.35 10.317,6.35 10.668,5.999 10.668,1.843 10.317,1.492 9.144,1.492 ; 7.705,8.89 12.332,8.89 12.742,8.48 12.742,2.792 12.742,0.902 12.332,0.492 9.144,0.492
  Bottom Layer w0.254: -8.82,0.5 -8.816,0.504 -7.878,0.504 v1(-7.874,0.508) ; v1(-6.157,-1.082) -4.511,-1.082 -4.191,-0.762 v1(-3.175,0.254) ; v1(1.524,-8.636) 1.524,-4.699 2.921,-3.302 4.026,-3.302 4.175,-3.153 4.175,-1.921 4.191,-1.905
  other v1: 4.191,1.905
  other v3: -11.5,-11.43 11.5,-11.43 -11.5,11.557 11.5,11.557

## Polygon pours and split planes (outlines as drawn)
GND on Top Layer "GND_L01_P002" (solid, pour order 2): -13.851,-14 -14,-13.851 -14,13.843 -13.843,14 13.851,14 14,13.851 14,-13.851 13.851,-14
GND on Bottom Layer "GND_L02_P004" (solid, remove dead copper, pour order 4): -13.851,-14 -14,-13.851 -14,13.843 -13.843,14 13.851,14 14,13.851 14,-13.851 13.851,-14

## Other copper
Top Layer:
  pour cut-out: -11.811,3.302 -11.684,3.175 -5.461,3.175 -5.461,-2.032 -6.731,-3.302 -7.493,-2.54 -12.065,-2.54
  pour cut-out: -3.683,7.62 0.254,7.62 0.572,7.302 0.381,7.112 0.381,5.461 -3.302,5.461 -2.921,5.842 1.143,5.842 1.143,6.223 1.013,6.353
  pour cut-out: -3.048,8.382 -3.048,7.239 0.635,7.239 0.508,7.366 0.508,8.509
  pour cut-out: -5.842,5.842 -5.588,6.096 2.667,6.096 2.667,1.651 2.413,1.397 1.778,2.032 -5.715,2.032
  pour cut-out: 2.515,1.905 2.159,1.905 2.159,1.651 1.778,1.27 2.032,1.016 2.667,1.016 2.667,1.753
  pour cut-out: -2.638,1.241 -2.608,1.27 2.667,1.27 2.667,-1.753 2.388,-2.032 -2.667,-2.032

## Silkscreen, mask and mechanical layers (free items; w line width, h text height)
Mechanical 1:
  the board outline again, w0.2

## Text inside footprints (layer, text, board x,y; h text height)
U1: Bottom Overlay "*" at -8.798,-4.807 h1.27 r90; Bottom 3D Body "*" at -7.671,-5.944 h1.27 r90
U3: Top Overlay "*" at -7.487,-7.595 h1.27; Top 3D Body "*" at -6.121,-8.75 h1.27